# Altium PCB SumoPCB.PcbDoc (part 1 of 2)
Units mil, origin at the board's own origin, x right, y up, seen from the top; angles counter-clockwise.
Board outline 5511.81 x 5511.81 mil, 2 copper layers (Top Layer, Bottom Layer); 161 components, 158 nets, 711 pads, 189 vias.
Unrouted connection lines stored in the file: 147.
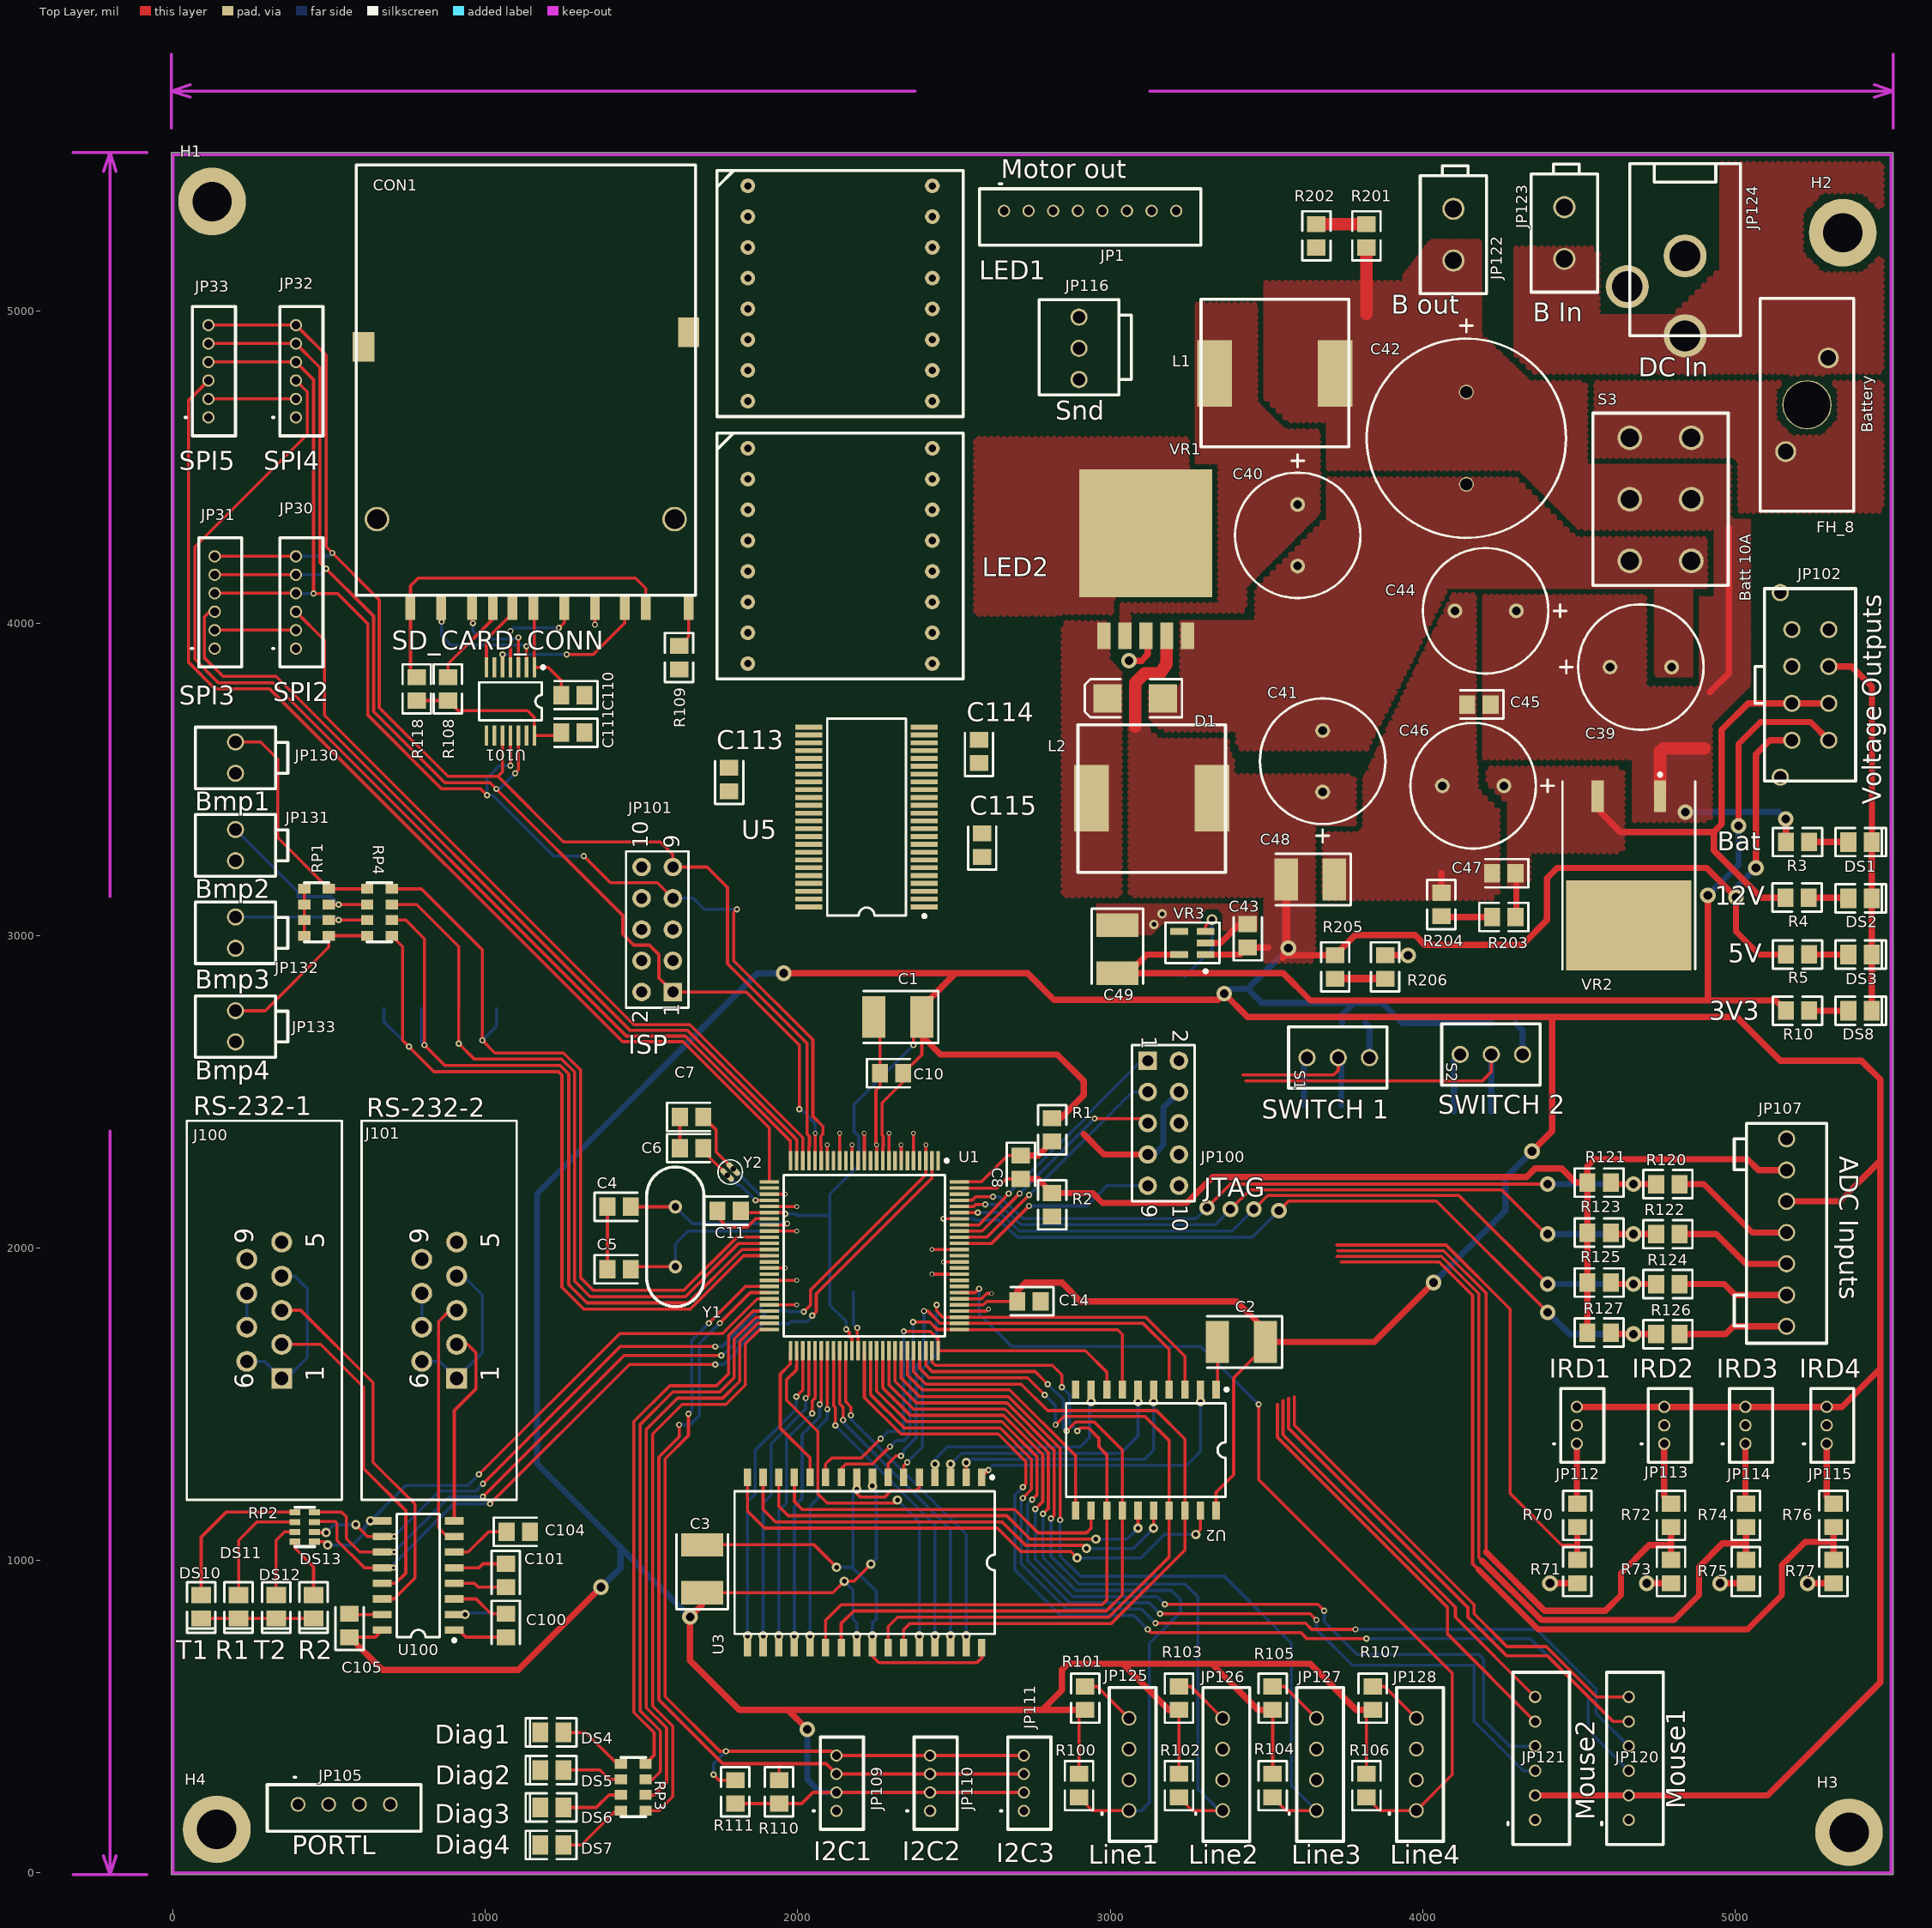
[diagram p0: Top Layer view]
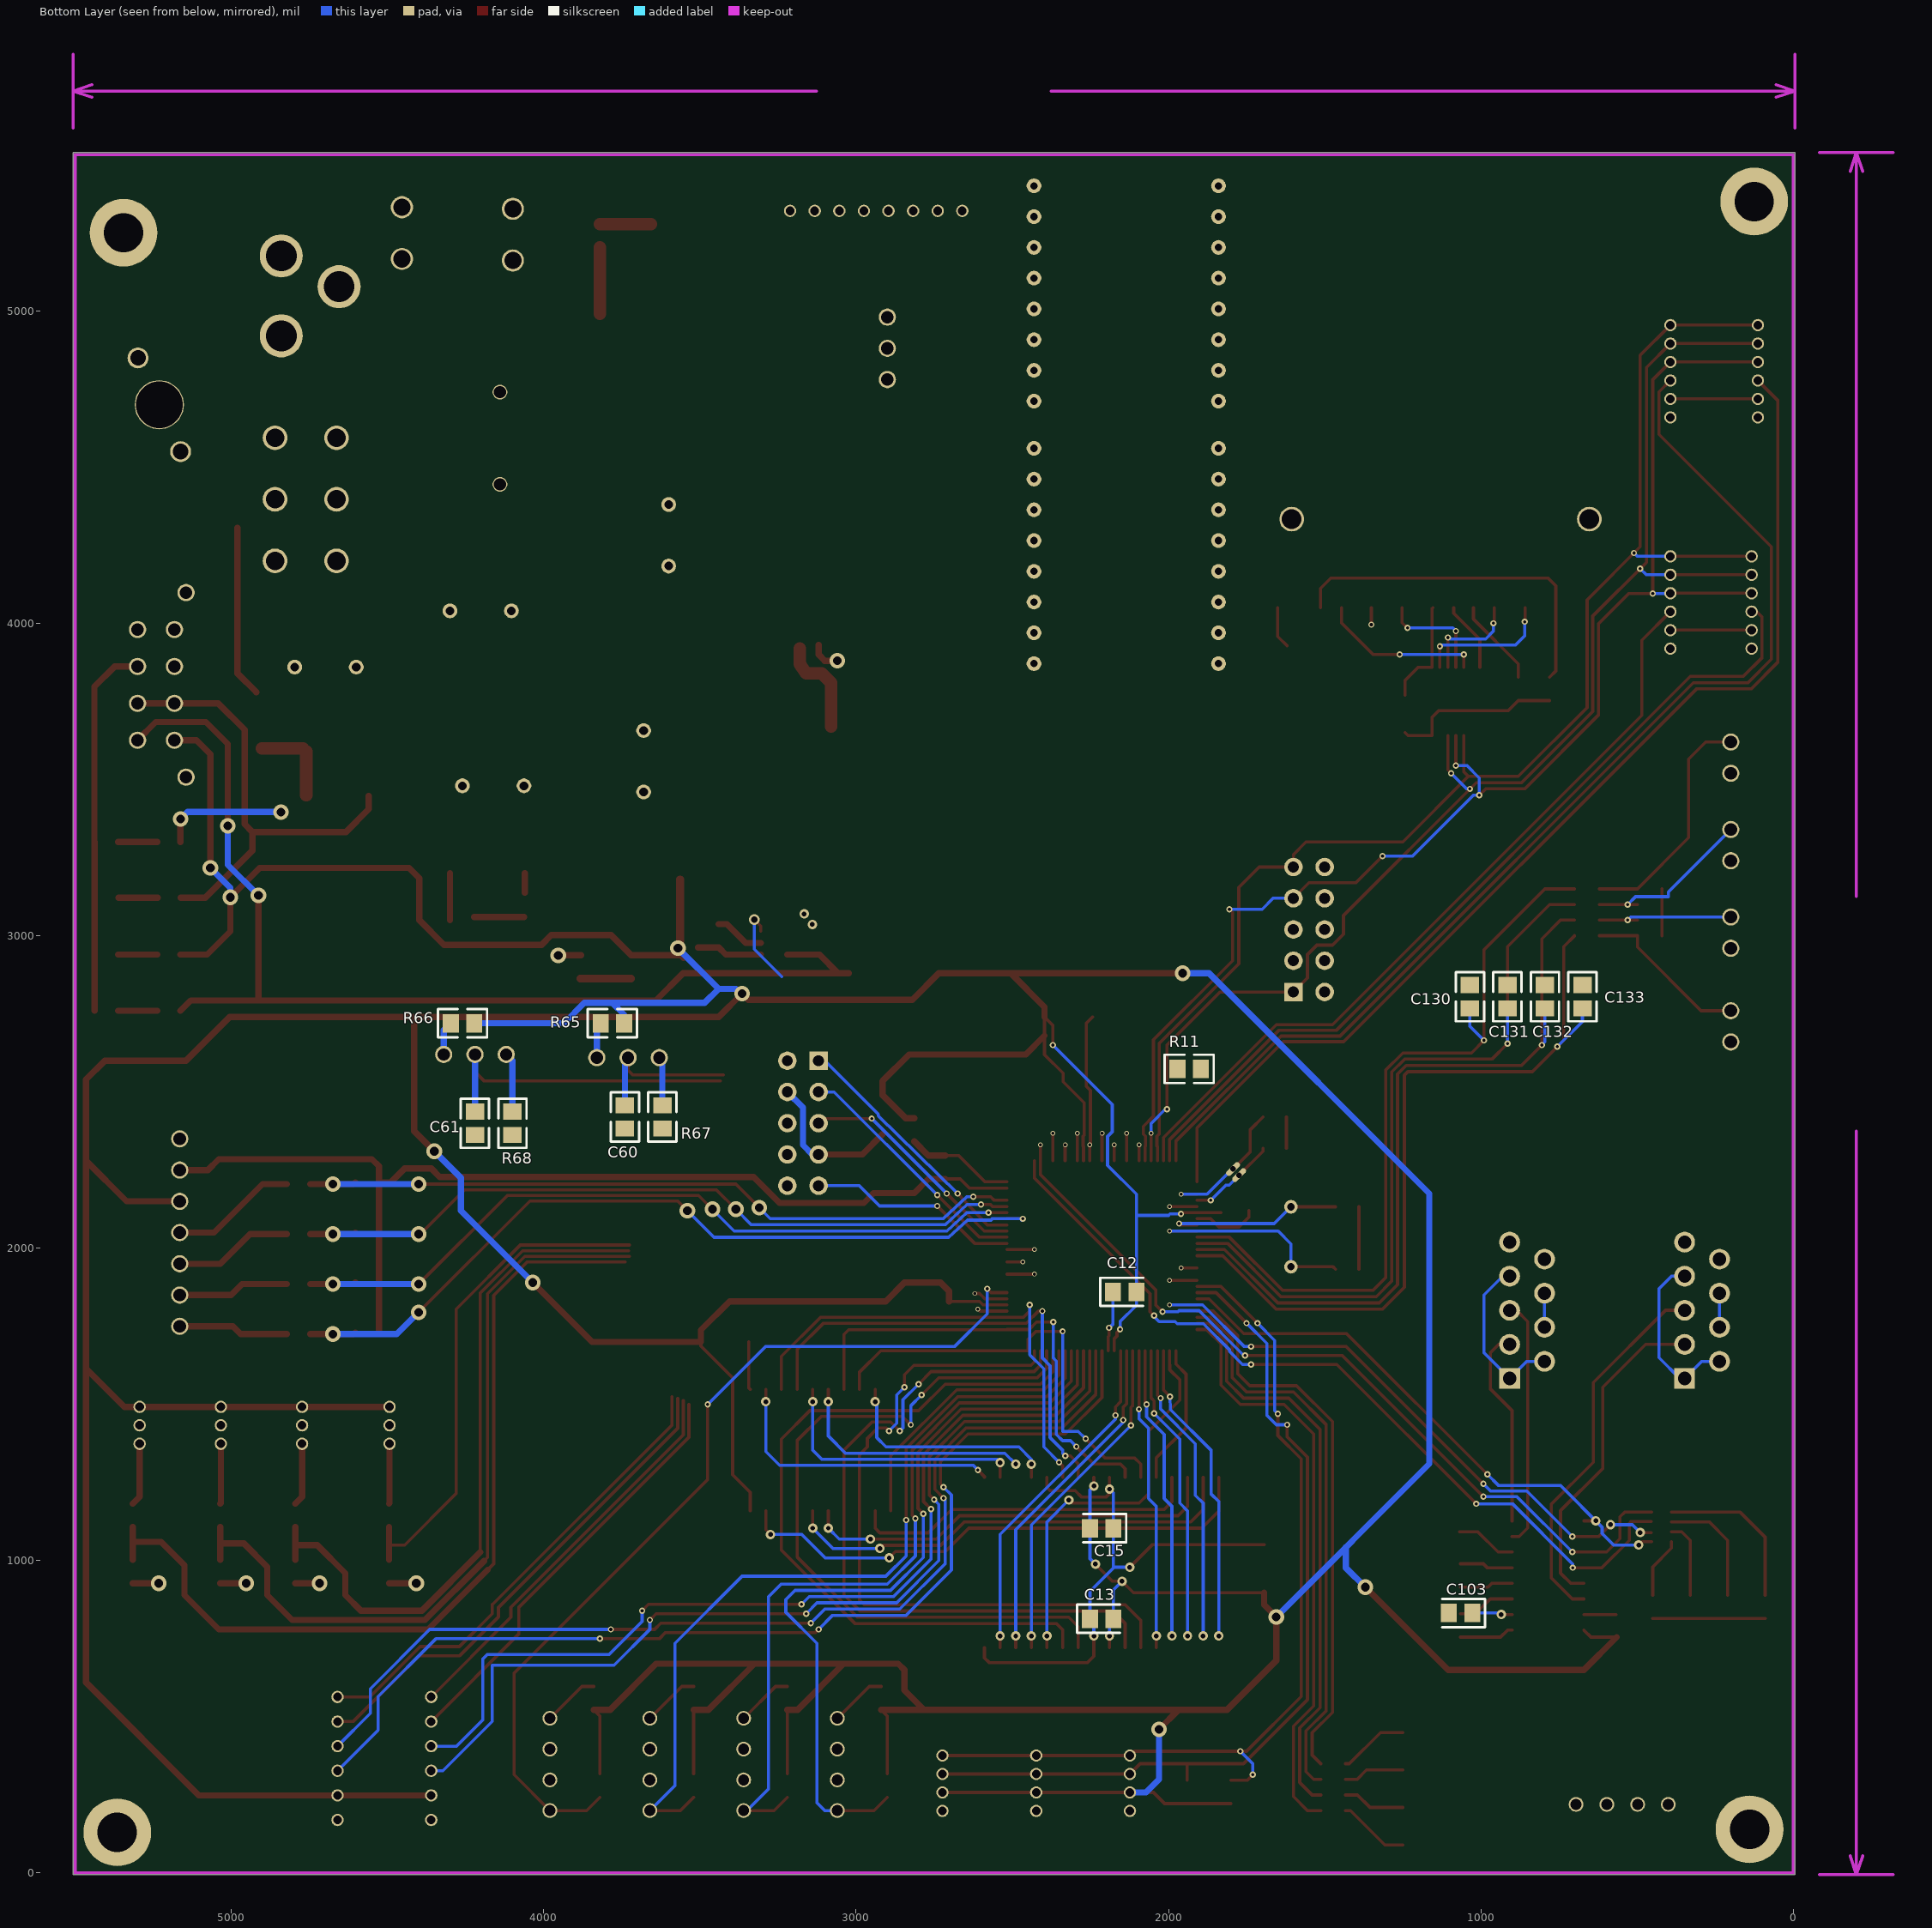
[diagram p1: Bottom Layer view, seen from below]

## Layer stack, top to bottom
Top Layer: signal copper 1.4
Dielectric: dielectric 12.6, FR-4, Dk 4.8
Bottom Layer: signal copper 1.4

## Board outline
-5.2,-5.2 5506.61,-5.2 5506.61,5506.61 -5.2,5506.61

## Design rules (kind name [scope] priority, off if disabled: settings)
Clearance Clearance_1_Polygons [(InPolygon)] p1: gap=15
Clearance Clearance_2_All [All] p2: gap=8
ComponentClearance [All] p1: gap=10 collisioncheckmode=0
PolygonConnect [All] p1: connectstyle=Direct reliefconductorwidth=10 reliefentries=4 polygonreliefangle="90 Angle"
RoomDefinition "Power Regulation and Protection" [InComponentClass('Power Regulation and Protection')] p1: confinementstyle=ConfineIn formatcopy=TRUE outline 3110,6430 6130,6430 6130,7400 3110,7400
RoomDefinition "Microcontroller and Memory" [InComponentClass('Microcontroller and Memory')] p2: confinementstyle=ConfineIn formatcopy=TRUE outline 13630,-470 14720,-470 14720,680 13630,680
RoomDefinition "Interfaces and Connectors - Sensors" [InComponentClass('Interfaces and Connectors - Sensors')] p3: confinementstyle=ConfineIn formatcopy=TRUE outline -1370,7070 230,7070 230,9640 -1370,9640
RoomDefinition "Interfaces and Connectors" [InComponentClass('Interfaces and Connectors')] p4: confinementstyle=ConfineIn formatcopy=TRUE outline 15890,-290 17600,-290 17600,1330 15890,1330
RoutingLayers [All] p1: top layer=Horizontal bottom layer=Vertical
RoutingVias "Schematic Routing Via Style" [All] p1: holewidth=28 width=50 viastyle="Through Hole" minholewidth=10 minwidth=20 maxholewidth=28 maxwidth=50
SMDToPlane [All] p1: distance=0
SolderMaskExpansion [All] p1: expansion=4
TestPointUsage [All] p1: valid=0 allowmultiple=FALSE
Testpoint [All] p1: side=15 testpointundercomponent=TRUE minsize=40 maxsize=100 preferedsize=60 minholesize=0 maxholesize=40 preferedholesize=32 testpointgrid=1 style=1023 order=-539222988
Width "Schematic Width Constraint" [All] p1: maxlimit=100 minlimit=10 preferedwidth=10 toplayer_prefwidth=20 bottomlayer_prefwidth=20 minimp=50.000000 maximp=50.000000 favimp=50.000000
16 further rules are at their usual default settings.

## Classes and differential pairs
net class AD[0..7]: AD0 AD1 AD2 AD3 AD4 AD5 AD6 AD7
net class A[8..15]: A0 A1 A2 A3 A4 A5 A6 A7 A8 A9 A10 A11 A12 A13 A14 A15
component class "Power Regulation and Protection": C39 C40 C41 C42 C43 C44 C45 C46 C47 C48 C49 D1 FH_8 L1 L2 R201 R202 R203 R204 R205 R206 S3 VR1 VR2 VR3
component class "Microcontroller and Memory": C1 C2 C3 C4 C5 C6 C7 C8 C10 C11 C12 C13 C14 C15 DS1 DS2 DS3 DS4 DS5 DS6 DS7 DS8 H1 H2 H3 H4 R1 R2 R3 R4 R5 R10 R11 RP3 U1 U2 U3 Y1 Y2
component class "Interfaces and Connectors": C100 C101 C103 C104 C105 C110 C111 C113 C114 C115 CON1 DS10 DS11 DS12 DS13 J100 J101 JP1 JP30 JP31 JP32 JP33 JP100 JP101 JP102 JP105 JP107 JP109 JP110 JP111 JP116 JP120 JP121 JP124 LED1 LED2 R108 R109 R110 R111 R118 R120 R121 R122 R123 R124 R125 R126 R127 RP2 U5 U100 U101
component class "Interfaces and Connectors - Sensors": C60 C61 C130 C131 C132 C133 JP112 JP113 JP114 JP115 JP120 JP121 JP125 JP126 JP127 JP128 JP130 JP131 JP132 JP133 R65 R66 R67 R68 R70 R71 R72 R73 R74 R75 R76 R77 R100 R101 R102 R103 R104 R105 R106 R107 RP1 RP4 S1 S2

## Components (designator, comment, footprint, x,y, rotation, side; value= is the part's Value field where it differs from the comment)
C1 "Cap Tant" CC4532-1812 2320,2740 r180 top
C2 "Cap Tant" CC4532-1812 3420,1700 r180 top
C3 "Cap Tant" CC4532-1812 1693.92,973.92 r90 top
C4 "20pF" CC2012-0805 1427.78,2132.5 r0 top
C5 "20pF" CC2012-0805 1427.78,1932.5 r0 top
C6 "6pF" CC2012-0805 1660,2320 r0 top
C7 "6pF" CC2012-0805 1660,2420 r0 top
C8 "100nF" CC2012-0805 2713.92,2258.92 r270 top
C10 "Cap Semi" CC2012-0805 2300,2560 r0 top
C11 "Cap Semi" CC2012-0805 1780,2120 r0 top
C12 "Cap Semi" CC2012-0805 2140,1860 r180 bottom
C13 "Cap Semi" CC2012-0805 2213.92,813.92 r180 bottom
C14 "Cap Semi" CC2012-0805 2740,1830 r180 top
C15 "Cap Semi" CC2012-0805 2213.92,1103.92 r0 bottom
C39 "Cap Pol1" CAPPOL5-10X13 4600,3860 r0 top
C40 "Cap Pol1" CAPPOL5-10X13 3600,4380 r270 top
C41 "Cap Pol1" CAPPOL5-10X13 3680,3460 r90 top
C42 "Cap Pol1" CAPPOL7.5-16 4140,4740 r270 top
C43 "Cap Pol3" CC2012-0805 3440,3000 r90 top
C44 "Cap Pol1" CAPPOL5-10X13 4300,4040 r180 top
C45 "Cap Pol3" CC2012-0805 4180,3740 r180 top
C46 "Cap Pol1" CAPPOL5-10X13 4260,3480 r180 top
C47 "Cap Pol3" CC2012-0805 4260,3200 r180 top
C48 "Tant" CC4532-1812 3640,3180 r180 top
C49 "Low ESR 0.3-10R Tant" CC4532-1812 3023,2957 r270 top
C60 "Cap Semi" CR2012-0805 3740,2420 r90 bottom
C61 "Cap Semi" CR2012-0805 4220,2400 r270 bottom
C100 "Cap Semi" CC2012-0805 1065,792.4 r270 top
C101 "Cap Semi" CC2012-0805 1065,952.4 r270 top
C103 "Cap Semi" CC2012-0805 1065,832.4 r0 bottom
C104 "Cap Semi" CC2012-0805 1105,1092.4 r0 top
C105 "Cap Semi" CC2012-0805 565,792.4 r90 top
C110 "Cap Semi" CC2012-0805 1280,3770 r180 top
C111 "Cap Semi" CC2012-0805 1280,3650 r180 top
C113 "Cap Semi" CC2012-0805 1780,3500 r90 top
C114 "Cap Semi" CC2012-0805 2580,3590 r90 top
C115 "Cap Semi" CC2012-0805 2590,3290 r90 top
C130 "Cap Semi" CR2012-0805 1035,2805 r270 bottom
C131 "Cap Semi" CR2012-0805 915,2805 r270 bottom
C132 "Cap Semi" CR2012-0805 795,2805 r270 bottom
C133 "Cap Semi" CR2012-0805 675,2805 r270 bottom
CON1 "SD_CARD_CONN" "SD CARD AVX" 760,4050 r0 top
D1 "10BQ100" SMB 3080,3760 r180 top
DS1 "Bat" "SMD _LED" 5400,3300 r180 top
DS2 "12V" "SMD _LED" 5400,3120 r180 top
DS3 "5V" "SMD _LED" 5400,2940 r180 top
DS4 "Diag1" "SMD _LED" 1212.6,450 r0 top
DS5 "Diag2" "SMD _LED" 1212.6,330 r0 top
DS6 "Diag3" "SMD _LED" 1212.6,210 r0 top
DS7 "Diag4" "SMD _LED" 1212.6,90 r0 top
DS8 "3V3" "SMD _LED" 5400,2760 r180 top
DS10 "T1" "SMD _LED" 90,852.4 r90 top
DS11 "R1" "SMD _LED" 210,852.4 r90 top
DS12 "T2" "SMD _LED" 330,852.4 r90 top
DS13 "R2" "SMD _LED" 450,852.4 r90 top
FH_8 "Battery" "FUSEHOLDER MINIBLADE" 5380,5040 r180 top
H1 "M3 Clearance" "M3 CLEARANCE" 125,5350 r0 top
H2 "M3 Clearance" "M3 CLEARANCE" 5345,5250 r0 top
H3 "M3 Clearance" "M3 CLEARANCE" 5365,130 r0 top
H4 "M3 Clearance" "M3 CLEARANCE" 140,140 r0 top
J100 "RS-232-1" "DSUB1.385-2H9 SIMPLE" 540,1195 r90 top
J101 "RS-232-2" "DSUB1.385-2H9 SIMPLE" 1100,1195 r90 top
JP1 "Motor out" "PHR 1X8 2MM" 2660,5320 r0 top
JP30 "SPI2" "ZHR 1X6 1.5MM" 480,3860 r90 top
JP31 "SPI3" "ZHR 1X6 1.5MM" 220,3860 r90 top
JP32 "SPI4" "ZHR 1X6 1.5MM" 480,4600 r90 top
JP33 "SPI5" "ZHR 1X6 1.5MM" 200,4600 r90 top
JP100 "JTAG" HDR2X5 3120,2600 r270 top
JP101 "ISP" HDR2X5 1600,2820 r90 top
JP102 "Voltage Outputs" "microfit 2x4 3mm" 5300,3980 r90 top
JP105 "PORTL" "EHR 1X4 2.5MM" 400,220 r0 top
JP107 "ADC Inputs" "KK 1X7 2.54MM" 5165,2350 r270 top
JP109 "I2C1" "ZHR 1X4 1.5MM" 2210,140 r90 top
JP110 "I2C2" "ZHR 1X4 1.5MM" 2510,140 r90 top
JP111 "I2C3" "ZHR 1X4 1.5MM" 2810,140 r90 top
JP112 "IRD1" "ZHR 1X3 1.5MM" 4580,1315 r90 top
JP113 "IRD2" "ZHR 1X3 1.5MM" 4860,1315 r90 top
JP114 "IRD3" "ZHR 1X3 1.5MM" 5120,1315 r90 top
JP115 "IRD4" "ZHR 1X3 1.5MM" 5380,1315 r90 top
JP116 "Snd" "KK 1X3 2.54MM" 2900,4780 r90 top
JP120 "Mouse1" "PHR 1X6 2MM" 4660,170 r90 top
JP121 "Mouse2" "PHR 1X6 2MM" 4360,170 r90 top
JP122 "B out" "MINI-FIT JNR 2X1 4.2MM" 4205,5055 r90 top
JP123 "B In" "MINI-FIT JNR 2X1 4.2MM" 4560,5060 r90 top
JP124 "DC In" "DC JACK 2.1MM" 4840,4920 r90 top
JP125 "Line1" "EHR 1X4 2.5MM" 3060,200 r90 top
JP126 "Line2" "EHR 1X4 2.5MM" 3360,200 r90 top
JP127 "Line3" "EHR 1X4 2.5MM" 3660,200 r90 top
JP128 "Line4" "EHR 1X4 2.5MM" 3980,200 r90 top
JP130 "Bmp1" "KK 1X2 2.54MM" 200,3520 r90 top
JP131 "Bmp2" "KK 1X2 2.54MM" 200,3240 r90 top
JP132 "Bmp3" "KK 1X2 2.54MM" 200,2960 r90 top
JP133 "Bmp4" "KK 1X2 2.54MM" 200,2660 r90 top
L1 "Inductor" "CDRH125 INDUCTOR" 3720,4800 r90 top
L2 "Inductor" "CDRH125 INDUCTOR" 2940,3440 r270 top
LED1 "8x8 LED Matrix" "8X8 LED MATRIX" 1840,5400 r0 top
LED2 "8x8 LED Matrix" "8X8 LED MATRIX" 1840,4560 r0 top
R1 "0K" R2012-0805 2813.92,2378.92 r90 top
R2 "0K" R2012-0805 2813.92,2138.92 r90 top
R3 "Res3" R2012-0805 5200,3300 r180 top
R4 "Res3" R2012-0805 5198.6,3122 r180 top
R5 "Res3" R2012-0805 5200,2940 r180 top
R10 "Res3" R2012-0805 5200,2760 r180 top
R11 "Res3" R2012-0805 1933.92,2573.92 r180 bottom
R65 "Res3" R2012-0805 3780,2720 r180 bottom
R66 "Res3" R2012-0805 4260,2720 r180 bottom
R67 "Res3" R2012-0805 3620,2420 r270 bottom
R68 "Res3" R2012-0805 4100,2400 r270 bottom
R70 "Res1" CR2012-0805 4495,1145 r90 top
R71 "Res1" CR2012-0805 4495,965 r90 top
R72 "Res1" CR2012-0805 4795,1145 r90 top
R73 "Res1" CR2012-0805 4795,965 r90 top
R74 "Res1" CR2012-0805 5035,1145 r90 top
R75 "Res1" CR2012-0805 5035,965 r90 top
R76 "Res1" CR2012-0805 5315,1145 r90 top
R77 "Res1" CR2012-0805 5315,965 r90 top
R100 "Res1" R2012-0805 2900,280 r270 top
R101 "Res1" R2012-0805 2920,560 r90 top
R102 "Res1" R2012-0805 3220,280 r270 top
R103 "Res1" R2012-0805 3220,560 r90 top
R104 "Res1" R2012-0805 3520,280 r270 top
R105 "Res1" R2012-0805 3520,560 r90 top
R106 "Res1" R2012-0805 3820,280 r270 top
R107 "Res1" R2012-0805 3840,560 r90 top
R108 "Res3" CR2012-0805 880,3790 r270 top
R109 "Res3" CR2012-0805 1620,3890 r270 top
R110 "10K" CR2012-0805 1940,260 r270 top
R111 "10K" CR2012-0805 1800,260 r270 top
R118 "Res3" CR2012-0805 780,3790 r270 top
R120 "Res1" CR2012-0805 4785,2205 r0 top
R121 "Res1" CR2012-0805 4565,2210 r0 top
R122 "Res1" CR2012-0805 4785,2045 r0 top
R123 "Res1" CR2012-0805 4565,2050 r0 top
R124 "Res1" CR2012-0805 4785,1885 r0 top
R125 "Res1" CR2012-0805 4565,1890 r0 top
R126 "Res1" CR2012-0805 4785,1725 r0 top
R127 "Res1" CR2012-0805 4565,1730 r0 top
R201 "Res3" R2012-0805 3820,5240 r90 top
R202 "Res3" R2012-0805 3660,5240 r270 top
R203 "Res3" R2012-0805 4260,3060 r180 top
R204 "Res3" R2012-0805 4060,3100 r90 top
R205 "Res3" R2012-0805 3720,2900 r270 top
R206 "Res3" R2012-0805 3880,2900 r90 top
RP1 "ResPack x4" "4X0805 RESISTOR PACK" 420,3000 r90 top
RP2 "ResPack x4" "4X0603 RESISTOR PACK" 390,1155 r270 top
RP3 "ResPack x4" "4X0805 RESISTOR PACK" 1512.6,350 r270 top
RP4 "ResPack x4" "4X0805 RESISTOR PACK" 700,3150 r270 top
S1 "SWITCH 1" "SW SPDT" 3630,2610 r0 top
S2 "SWITCH 2" "SW SPDT" 4120,2620 r0 top
S3 "Batt 10A" "SW  DPDT" 4860,4200 r90 top
U1 "ATmega2560" F-QFP14X14-G100/Z17N 2212.7,1976.05 r270 top
U2 "74HC373M" SO-G20/Y1.45 3113.92,1353.92 r180 top
U3 "K6R1008C1D" SO-G32/Y1.45 2213.92,993.92 r180 top
U5 "TLS5920" SSO-G48 2220,3380 r90 top
U100 "MAX232" SO-G16/C5.85 785,952.4 r90 top
U101 "MAX3392E" TSSOP14 1080,3750 r180 top
VR1 "LM2595S-5.0" "TO-263 5 PIN SMT" 2980,3960 r270 top
VR2 "MC7812CD2T" 936-03 4660,3240 r180 top
VR3 "TPS76333DBVR" SOT-23-5 3263,2977 r90 top
Y1 "16MHz" "CRYSTAL HC49SLF" 1607.78,2132.5 r270 top
Y2 "32kHz" "CRYSTAL CFS206" 1773.92,2233.92 r45 top

## Footprints (in the part's own frame and the unit in brackets; to place one, negate y for a bottom-side part, rotate by r counter-clockwise, add the part's x,y. Pads: shape width x height; smd on the part's side, far side on the other; paste and mask are expansions set on the pad)
"4X0603 RESISTOR PACK" [mm] "4x0603 Resistor pack 3.2 x 1.6mm, 0.8mm Pitch"
  rect 0.5x0.9 smd: 1(0,0) 2(0.8,0) 3(1.6,0) 4(2.4,0) 5(2.4,1.6) 6(1.6,1.6) 7(0.8,1.6) 8(0,1.6)
  silkscreen extent -0.4,0 2.8,1.6
"4X0805 RESISTOR PACK" [mm] "4x0805 Resistor pack 5.08 x 2mm, 1.27mm Pitch"
  rect 0.8x1 smd: 1(0,-2) 2(1.27,-2) 3(2.54,-2) 4(3.81,-2) 5(3.81,0) 6(2.54,0) 7(1.27,0) 8(0,0)
  silkscreen extent -0.5,-2 4.3,0
"8X8 LED MATRIX" [mm] "8x8 LED matrix 2.5mm pitch"
  round 1.2 hole 0.6: 1(0,0) 2(0,-2.5) 3(0,-5) 4(0,-7.5) 5(0,-10) 6(0,-12.5) 7(0,-15) 8(0,-17.5) 9(15,-17.5) 10(15,-15) 11(15,-12.5) 12(15,-10) 13(15,-7.5) 14(15,-5) 15(15,-2.5) 16(15,0)
  silkscreen extent -2.5,-18.75 17.5,1.25
936-03 [mm] "D2-PAK/TO-263-AB; 3 Leads (1 Cropped); Body 14.7 (inc. leads) x 10.2 mm (LxW max)"
  rect 1x2.6 smd: 1(-2.54,-5.25) 3(2.54,-5.25)
  rect 10.2x7.3 smd: 4(0,5.25)
  silkscreen extent -5.4,-7.12 5.4,8.8
CAPPOL5-10X13 [mm]
  round 1.2 hole 0.7: 1(0,0) 2(5,0)
  silkscreen extent -4.06,-5.1 7.6,5.1
CAPPOL7.5-16 [mm] "7.5P, 16D, 0.8PD"
  round 1.2 hole 1: 1(0,0) 2(7.5,0)
  silkscreen extent -5.9,-8.1 11.85,8.1
CC2012-0805 [mm]
  rect 1.3x1.5 smd: 1(-0.95,0) 2(0.95,0)
  silkscreen extent -2,-1.15 1.5,1.15
CC4532-1812 [mm]
  rect 1.9x3.4 smd: 1(-1.95,0) 2(1.95,0)
  silkscreen extent -3.3,-2.1 2.8,2.1
"CDRH125 INDUCTOR" [mm] "CDRH125 Inductor 12.3mm x 12.3mm"
  rect 5.4x2.8 smd: 1(0,0) 2(0,9.8)
  silkscreen extent -5.98,-1.1 6.02,10.9
CR2012-0805 [mm]
  rect 1.3x1.5 smd: 1(-0.95,0) 2(0.95,0)
  silkscreen extent -2,-1.15 2,1.15
"CRYSTAL CFS206" [mm] "Crystal CFS206 0.7mm pitch 0.2mm lead"
  oval 0.45x1.4 hole 0.45: 1(0,0) 2(0.7,0)
  silkscreen extent -0.65,-1 1.35,1
"CRYSTAL HC49SLF" [mm] "HC49SLF TH 4.88mm Pitch, 0.43mm lead"
  round 1.1 hole 0.6: 1(0,0) 2(4.88,0)
  silkscreen extent -3.23,-2.32 8.12,2.32
"DC JACK 2.1MM" [mm] "DC Jack 2.1mm  Altronics P0620"
  round 3.5 hole 2.5: 1(0,0) 2(6.5,0) 3(4,4.7)
  silkscreen extent 0,-4.5 14,4.5
"DSUB1.385-2H9 SIMPLE" [mm]
  rect 1.69x1.69 hole 1.09: 1(9.86,4.88)
  round 1.69 hole 1.09: 2(12.63,4.88) 3(15.4,4.88) 4(18.17,4.88) 5(20.94,4.88) 6(11.245,7.72) 7(14.015,7.72) 8(16.785,7.72) 9(19.555,7.72)
  silkscreen extent 0,0 30.8,12.6
"EHR 1X4 2.5MM" [mm] "JST EHR 1x4 2.5mm 3A"
  round 1.2 hole 0.9: 1(0,0) 2(2.5,0) 3(5,0) 4(7.5,0)
  silkscreen extent -2.5,-2.2 10,2.2
F-QFP14X14-G100/Z17N [mm]
  rect 1.55x0.3 smd: 1(-7.725,6) 2(-7.725,5.5) 3(-7.725,5) 4(-7.725,4.5) 5(-7.725,4) 6(-7.725,3.5) 7(-7.725,3) 8(-7.725,2.5) 9(-7.725,2) 10(-7.725,1.5) 11(-7.725,1) 12(-7.725,0.5) 13(-7.725,0) 14(-7.725,-0.5) 15(-7.725,-1) 16(-7.725,-1.5) 17(-7.725,-2) 18(-7.725,-2.5) 19(-7.725,-3) 20(-7.725,-3.5) 21(-7.725,-4) 22(-7.725,-4.5) 23(-7.725,-5) 24(-7.725,-5.5) 25(-7.725,-6) 51(7.725,-6) 52(7.725,-5.5) 53(7.725,-5) 54(7.725,-4.5) 55(7.725,-4) 56(7.725,-3.5) 57(7.725,-3) 58(7.725,-2.5) 59(7.725,-2) 60(7.725,-1.5) 61(7.725,-1) 62(7.725,-0.5) 63(7.725,0) 64(7.725,0.5) 65(7.725,1) 66(7.725,1.5) 67(7.725,2) 68(7.725,2.5) 69(7.725,3) 70(7.725,3.5) 71(7.725,4) 72(7.725,4.5) 73(7.725,5) 74(7.725,5.5) 75(7.725,6)
  rect 0.3x1.55 smd: 26(-6,-7.725) 27(-5.5,-7.725) 28(-5,-7.725) 29(-4.5,-7.725) 30(-4,-7.725) 31(-3.5,-7.725) 32(-3,-7.725) 33(-2.5,-7.725) 34(-2,-7.725) 35(-1.5,-7.725) 36(-1,-7.725) 37(-0.5,-7.725) 38(0,-7.725) 39(0.5,-7.725) 40(1,-7.725) 41(1.5,-7.725) 42(2,-7.725) 43(2.5,-7.725) 44(3,-7.725) 45(3.5,-7.725) 46(4,-7.725) 47(4.5,-7.725) 48(5,-7.725) 49(5.5,-7.725) 50(6,-7.725) 76(6,7.725) 77(5.5,7.725) 78(5,7.725) 79(4.5,7.725) 80(4,7.725) 81(3.5,7.725) 82(3,7.725) 83(2.5,7.725) 84(2,7.725) 85(1.5,7.725) 86(1,7.725) 87(0.5,7.725) 88(0,7.725) 89(-0.5,7.725) 90(-1,7.725) 91(-1.5,7.725) 92(-2,7.725) 93(-2.5,7.725) 94(-3,7.725) 95(-3.5,7.725) 96(-4,7.725) 97(-4.5,7.725) 98(-5,7.725) 99(-5.5,7.725) 100(-6,7.725)
  silkscreen extent -7.85,-6.55 6.55,6.83
"FUSEHOLDER MINIBLADE" [mm] "FuseHolder Miniblade"
  round 1.7 hole 1.27: 1(2.07,4.84) 2(5.53,12.46)
  round 4 hole 3.8: ""(3.8,8.65)
  silkscreen extent 0,0 7.6,17.3
HDR2X5 [mm] "Connector; Header; 5x2 Position"
  rect 1.5x1.5 hole 0.9: 1(0,0)
  round 1.5 hole 0.9: 2(0,2.54) 3(2.54,0) 4(2.54,2.54) 5(5.08,0) 6(5.08,2.54) 7(7.62,0) 8(7.62,2.54) 9(10.16,0) 10(10.16,2.54)
  silkscreen extent -1.27,-1.27 11.43,3.81
"KK 1X2 2.54MM" [mil] "KK 1x2 2.54mm 4A"
  round 55 hole 40: 1(0,0) 2(100,0)
  silkscreen extent -49,-167 148,128
"KK 1X3 2.54MM" [mil] "KK 1x3 2.54mm 4A"
  round 55 hole 40: 1(0,0) 2(100,0) 3(200,0)
  silkscreen extent -49,-167 256,128
"KK 1X7 2.54MM" [mil] "Molex KK 1x7 2.54mm 4A"
  round 55 hole 40: 1(0,0) 2(100,0) 3(200,0) 4(300,0) 5(400,0) 6(500,0) 7(600,0)
  silkscreen extent -49,-167 654,128
"M3 CLEARANCE" [mm] "M3 Clearance.   3.2mm ID for M3 screw"
  round 5.5 hole 3.2: 1(0,0)
"microfit 2x4 3mm" [mm] "microfit 2x4 3mm 5A"
  round 1.4 hole 1.02: 1(0,0) 2(-3,0) 3(-6,0) 4(-9,0) 5(0,3) 6(-3,3) 7(-6,3) 8(-9,3) nc(-12,3.94) nc(3,3.94)
  silkscreen extent -12.32,-2.18 3.32,6
"MINI-FIT JNR 2X1 4.2MM" [mm] "Mini-Fit Jnr 2x1 4.2mm pitch 9A"
  round 1.8 hole 1.4: 1(2.7,2.7) 2(6.9,2.7)
  silkscreen extent 0,0 10.4,5.4
"PHR 1X6 2MM" [mm] "JST PHR 1x6 2mm 2A"
  round 1 hole 0.7: 1(0,0) 2(2,0) 3(4,0) 4(6,0) 5(8,0) 6(10,0)
  silkscreen extent -2,-2.8 12,2.2
"PHR 1X8 2MM" [mm] "JST PHR 1x8 2mm 2A"
  round 1 hole 0.7: 1(0,0) 2(2,0) 3(4,0) 4(6,0) 5(8,0) 6(10,0) 7(12,0) 8(14,0)
  silkscreen extent -2,-2.8 16,2.2
R2012-0805 [mm]
  rect 1.3x1.5 smd: 1(-0.95,0) 2(0.95,0)
  silkscreen extent -2,-1.15 2,1.15
"SD CARD AVX" [mm] "SD Card AVX 145638009211862"
  rect 0.8x2 smd: 1(2.5,0) 2(5,0) 3(8.3,0) 4(10,0) 5(12.5,0) 6(15,0) 7(17.43,0) 8(19.13,0) 9(0,0) 10(6.7,0) 11(22.62,0)
  rect 1.7x2.4 smd: 12(22.63,22.4)
  rect 1.8x2.4 smd: ""(-3.82,21.2)
  round 2 hole 1.6: ""(-2.72,7.2) ""(21.48,7.2)
  silkscreen extent -4.42,1 23.18,36
SMB [mm] "DO-214-AA/SMB; 2 C-Bend Leads; Body 5.3 x 3.6 mm, inc. leads (LxW)"
  rect 2.3x2.3 smd: 1(-2.25,0) 2(2.25,0)
  silkscreen extent -3.8,-1.55 4.1,1.55
"SMD _LED" [mm]
  rect 1.3x1.6 smd: 1(0.95,0) 2(-0.95,0)
  silkscreen extent -2.13,-1.15 2,1.15
SO-G16/C5.85 [mm]
  rect 0.6x1.55 smd: 1(-4.445,-2.925) 2(-3.175,-2.925) 3(-1.905,-2.925) 4(-0.635,-2.925) 5(0.635,-2.925) 6(1.905,-2.925) 7(3.175,-2.925) 8(4.445,-2.925) 9(4.445,2.925) 10(3.175,2.925) 11(1.905,2.925) 12(0.635,2.925) 13(-0.635,2.925) 14(-1.905,2.925) 15(-3.175,2.925) 16(-4.445,2.925)
  silkscreen extent -5.39,-3.05 5,1.75
SO-G20/Y1.45 [mm]
  rect 0.6x1.45 smd: 1(-5.715,-4.925) 2(-4.445,-4.925) 3(-3.175,-4.925) 4(-1.905,-4.925) 5(-0.635,-4.925) 6(0.635,-4.925) 7(1.905,-4.925) 8(3.175,-4.925) 9(4.445,-4.925) 10(5.715,-4.925) 11(5.715,4.925) 12(4.445,4.925) 13(3.175,4.925) 14(1.905,4.925) 15(0.635,4.925) 16(-0.635,4.925) 17(-1.905,4.925) 18(-3.175,4.925) 19(-4.445,4.925) 20(-5.715,4.925)
  silkscreen extent -6.69,-5.05 6.48,3.8
SO-G32/Y1.45 [mm]
  rect 0.6x1.45 smd: 1(-9.525,-6.925) 2(-8.255,-6.925) 3(-6.985,-6.925) 4(-5.715,-6.925) 5(-4.445,-6.925) 6(-3.175,-6.925) 7(-1.905,-6.925) 8(-0.635,-6.925) 9(0.635,-6.925) 10(1.905,-6.925) 11(3.175,-6.925) 12(4.445,-6.925) 13(5.715,-6.925) 14(6.985,-6.925) 15(8.255,-6.925) 16(9.525,-6.925) 17(9.525,6.925) 18(8.255,6.925) 19(6.985,6.925) 20(5.715,6.925) 21(4.445,6.925) 22(3.175,6.925) 23(1.905,6.925) 24(0.635,6.925) 25(-0.635,6.925) 26(-1.905,6.925) 27(-3.175,6.925) 28(-4.445,6.925) 29(-5.715,6.925) 30(-6.985,6.925) 31(-8.255,6.925) 32(-9.525,6.925)
  silkscreen extent -10.58,-7.05 10.58,5.8
SOT-23-5 [mm]
  rect 0.55x1.45 smd: 1(-0.95,-1.075) 2(0,-1.075) 3(0.95,-1.075) 4(0.95,1.075) 5(-0.95,1.075)
  silkscreen extent -2.42,-2.2 1.65,2.2
SSO-G48 [mm] "SSO-G48 25mil (~0.6mm)P 48 pads"
  rect 0.4x2.2 smd: 1(-7.302,-4.7) 2(-6.667,-4.7) 3(-6.032,-4.7) 4(-5.397,-4.7) 5(-4.763,-4.7) 6(-4.127,-4.7) 7(-3.492,-4.7) 8(-2.857,-4.7) 9(-2.222,-4.7) 10(-1.587,-4.7) 11(-0.952,-4.7) 12(-0.317,-4.7) 13(0.318,-4.7) 14(0.953,-4.7) 15(1.588,-4.7) 16(2.223,-4.7) 17(2.858,-4.7) 18(3.492,-4.7) 19(4.127,-4.7) 20(4.763,-4.7) 21(5.397,-4.7) 22(6.032,-4.7) 23(6.667,-4.7) 24(7.302,-4.7) 25(7.302,4.7) 26(6.667,4.7) 27(6.032,4.7) 28(5.397,4.7) 29(4.763,4.7) 30(4.127,4.7) 31(3.492,4.7) 32(2.857,4.7) 33(2.222,4.7) 34(1.587,4.7) 35(0.952,4.7) 36(0.317,4.7) 37(-0.318,4.7) 38(-0.953,4.7) 39(-1.588,4.7) 40(-2.223,4.7) 41(-2.858,4.7) 42(-3.492,4.7) 43(-4.127,4.7) 44(-4.763,4.7) 45(-5.397,4.7) 46(-6.032,4.7) 47(-6.667,4.7) 48(-7.302,4.7)
  silkscreen extent -8.18,-4.83 8,3.2
"SW  DPDT" [mm] "Alltronics Toggle"
  round 2 hole 1.5: 1(0,0) 2(5,0) 3(10,0) 4(0,5) 5(5,5) 6(10,5)
  silkscreen extent -2,-3 12,8
"SW SPDT" [mm] "SW SPDT 0.1\" pitch"
  round 1.4 hole 1: 1(0,0) 2(2.54,0) 3(5.08,0)
  silkscreen extent -1.5,-2.5 6.5,2.5
"TO-263 5 PIN SMT" [mm] "TO-263 5 Pin SMT"
  rect 2.16x1.07 smd: 1(0,0) 2(0,1.7) 3(0,3.4) 4(0,5.1) 5(0,6.8)
  rect 10.41x10.8 smd: 3(-8.33,3.4)
TSSOP14 [mm] "Shrink Small Outline; 14 Leads; Body Width 4.4 mm; Pitch 0.65 mm"
  rect 0.3x1.65 smd: 1(-1.95,-2.775) 2(-1.3,-2.775) 3(-0.65,-2.775) 4(0,-2.775) 5(0.65,-2.775) 6(1.3,-2.775) 7(1.95,-2.775) 8(1.95,2.775) 9(1.3,2.775) 10(0.65,2.775) 11(0,2.775) 12(-0.65,2.775) 13(-1.3,2.775) 14(-1.95,2.775)
  silkscreen extent -2.77,-2.9 2.55,1.55
"ZHR 1X3 1.5MM" [mm] "JST ZHR 1x3 1.5mm 1A"
  round 1 hole 0.7: 1(1.5,2.2) 2(3,2.2) 3(4.5,2.2)
  silkscreen extent 0,0 6,4.1
"ZHR 1X4 1.5MM" [mm] "JST ZHR 1x4 1.5mm 1A"
  round 1 hole 0.7: 1(1.5,2.2) 2(3,2.2) 3(4.5,2.2) 4(6,2.2)
  silkscreen extent 0,0 7.5,4.1
"ZHR 1X6 1.5MM" [mm] "JST ZHR 1x6 1.5mm 1A"
  round 1 hole 0.7: 1(1.5,2.2) 2(3,2.2) 3(4.5,2.2) 4(6,2.2) 5(7.5,2.2) 6(9,2.2)
  silkscreen extent 0,0 10.5,4.1

## Part data
C1 C2 C3 C100 C101 C103 C104 C105: library part "Cap Pol2", "Polarized Capacitor (Axial)"
C4 C5 C6 C7 C8: library part Cap, "Capacitor"
C10 C11 C12 C13 C14 C15 C60 C61 C110 C111 C113 C114 C115 C130 C131 C132 C133: "Capacitor (Semiconductor SIM Model)"
C39 C40 C41 C42 C44 C46: "Polarized Capacitor (Radial)"
C43 C45 C47: "Polarized Capacitor (Surface Mount)"
C48 C49: library part "Cap Semi", "Capacitor (Semiconductor SIM Model)"
D1: "Schottky Rectifier"
DS1 DS2 DS3 DS4 DS5 DS6 DS7 DS8 DS10 DS11 DS12 DS13: library part LED3, "Typical BLUE SiC LED"
FH_8: library part Fuse_Holder, "Fuse Holder"
H1 H2 H3 H4: library part "M3 Clearance hole", "3.2mm ID clearance hole for M3 screw"
J100 J101: library part "D Connector 9", "Receptacle Assembly, 9 Position, Right Angle"
JP1: library part "Header 8", "Header, 8-Pin"
JP30 JP31 JP32 JP33: library part "Header 6", "Header, 6-Pin"
JP100 JP101: library part "Header 5X2", "Header, 5-Pin, Dual row"
JP102: library part "Header 4X2", "Header, 4-Pin, Dual row"
JP105 JP107 JP109 JP110 JP111: library part "Header 4", "Header, 4-Pin"
JP112 JP113 JP114 JP115: library part MHDR1X3, "Header, 3-Pin"
JP116 JP124: library part "Header 3", "Header, 3-Pin"
JP120 JP121 JP122 JP123 JP130 JP131 JP132 JP133: library part "Header 2", "Header, 2-Pin"
JP125 JP126 JP127 JP128: library part "Header 4H", "Header, 4-Pin, Right Angle"
R1 R2 R110 R111: library part Res1, "Resistor"
R3 R4 R5 R10 R11 R65 R66 R67 R68 R70 R71 R72 R73 R74 R75 R76 R77 R100 R101 R102 R103 R104 R105 R106 R107 R108 R109 R118 R120 R121 R122 R123 R124 R125 R126 R127 R201 R202 R203 R204 R205 R206: "Resistor"
S1 S2: library part SW-PB, "Switch"
S3: library part SW-SPDT, "SPDT Subminiature Toggle Switch, Right Angle Mounting, Vertical Actuation"
U1: "Atmel ATmega2560 MCU"
U2: library part 74373, "Octal 8-bit D-type Latch"
U3: "Samsung 128Kx8 High-Speed Static RAM"
U5: library part "TLC5920 16x8 LED Driver", "TLC5920 16x8 LED Driver"
U100: "Maxim RS-232 Transceiver"
VR1: "Simple Switcher Power Converter 150 kHz 1A Step Down Voltage Regulator"
VR2: "Three-Terminal Positive Voltage Regulator"
Y1 Y2: library part XTAL, "Crystal Oscillator"

## Via types
v1: diameter 20, hole 10, Top Layer to Bottom Layer, 98 vias
v2: diameter 30, hole 15, Top Layer to Bottom Layer, 37 vias
v3: diameter 50, hole 28, Top Layer to Bottom Layer, 32 vias
v4: diameter 15, hole 10, Top Layer to Bottom Layer, 21 vias
v5: diameter 35, hole 20, Top Layer to Bottom Layer, 1 vias

## Nets (pads, with @x,y where several pads share a name; then routed paths per layer and width w, separated by ;. In a path a pad name is that pad's centre, name@x,y a point inside that pad or via, vN(x,y) a via of type N, cw(c..) or ccw(c..) an arc to the next point about the centre after c; other vN are vias at no path point)
3V3: C49.2 C110.2 CON1.4 JP102.4 R10.2 U101.1 VR3.5 | length 3923.2
  Top Layer w10: CON1.4@1153.7,4050 1156.77,4046.93 U101.1@1156.77,3859.25 1200.75,3859.25 1242.6,3817.4 C110.2@1242.6,3770
  Top Layer w20: C49.2@3023,2880.23 3553.77,2880.23 3641,2793 5129.6,2793 R10.2@5162.6,2760 ; C49.2@3057.8,2880.23 3117.17,2939.6 VR3.5@3220.68,2939.6 ; 4913,2793 v3(4913,3129) ; v3(5011,3352) 5011,3614 5081,3684 5241.67,3684 JP102.4@5300,3625.67
  Bottom Layer w20: v3(4913,3129) 5011,3227 v3(5011,3352)
"3V3 ENABLE": U1.79 VR3.3 | length 361.3
  Top Layer w10: U1.79@2516.83,1798.88 2603.88,1798.88 v4(2610,1805) ; VR3.3@3305.32,3014.4 3305.32,3031.32 v5(3326,3052)
  Bottom Layer w10: 3238,2869 3326,2957 v5(3326,3052)
5V: C1.1 C2.1 C3.1 C10.2 C11.2 C12.2 C13.2 C14.2 C15.2 C41.1 C43.1 C48.2 C105.1 C111.2 C113.1 C114.1 C115.2 JP1.1 JP30.2 JP31.2 JP32.2 JP33.2 JP100.4 JP100.7 JP101.2 JP102.8 JP107.3 JP109.2 JP110.2 JP111.2 JP112.3 JP113.3 JP114.3 JP115.3 JP120.2 JP121.2 L2.2 R1.2 R5.2 R11.1 R65.2 R66.2 R100.1 R101.1 R102.1 R103.1 R104.1 R105.1 R106.1 R107.1 R108.2 R109.2 R110.2 R111.2 R118.2 R205.1 RP1.5 RP1.6 RP1.7 RP1.8 U1.10 U1.31 U1.61 U1.80 U2.20 U3.8 U3.24 U5.8 U5.18 U5.19 U5.31 U5.34 U100.16 U101.14 VR1.4 VR3.1 | length 31228.8
  Top Layer w10: JP33.2@113.39,4718.11 JP32.2@393.39,4718.11 ; JP31.2@133.39,3978.11 JP30.2@393.39,3978.11 ; RP1.8@420,3000 RP1.5@420,3150 ; C105.1@565,755 647.44,755 U100.16@669.84,777.4 ; R118.2@780,3752.6 R108.2@880,3752.6 912.6,3720 1135,3720 1156.77,3698.23 U101.14@1156.77,3640.75 1233.35,3640.75 C111.2@1242.6,3650 ; C3.1@1693.92,897.15 2112.15,897.15 v2(2148.92,933.92) 2178.92,933.92 v2(2233.92,988.92) ; R111.2@1800,222.6 2012.6,222.6 2048.11,258.11 JP111.2@2723.39,258.11 ; C11.2@1831.4,2113.84 1956.16,2113.84 v1(1960,2110) ; v1(2155,1740) 2165,1730 2165,1719.26 2173.33,1710.93 U1.61@2173.33,1671.91 ; U3.24@2188.92,721.28 v2(2188.92,758.92) ; v2(2238.92,1238.92) U3.8@2238.92,1266.56 ; U1.10@2271.76,2280.18 2271.76,2324.97 2273.44,2326.66 2273.44,2358 2270,2361.44 2270,2465 2337.4,2532.4 C10.2@2337.4,2560 2396.77,2619.37 C1.1@2396.77,2740 2370,2713.23 v1(2370,2650) ; U1.80@2516.83,1818.57 2593.57,1818.57 2605,1830 C14.2@2702.6,1830 ; R100.1@2900,317.4 2900,502.6 R101.1@2920,522.6 ; R102.1@3220,317.4 R103.1@3220,522.6 ; U2.20@3338.92,1160.02 3338.92,1218.92 3395,1275 3395,1585 3496.77,1686.77 C2.1@3496.77,1700 ; R104.1@3520,317.4 R105.1@3520,522.6 ; R106.1@3820,317.4 3820,502.6 R107.1@3840,522.6
  Top Layer w20: C105.1@565,755 670,650 1105,650 v3(1370,915) ; C3.1@1693.92,897.15 1693.92,858.92 v3(1655,820) 1655,680 1812.4,522.6 R101.1@2920,522.6 ; v3(1955,2880) 2735,2880 2820,2795 3345,2795 v3(3365,2815) 3440,2740 5005,2740 5145,2600 5405,2600 5465,2540 5465,610 5103.74,248.74 JP121.2@4360,248.74 ; 1967.4,522.6 v3(2030,460) ; C1.1@2396.77,2680 2456.77,2620 2830,2620 2915,2535 2915,2490 2841.32,2416.32 R1.2@2813.92,2416.32 ; C1.1@2396.77,2740 2396.77,2771.77 2505,2880 ; C14.2@2702.6,1830 2702.6,1862.6 2730,1890 2845,1890 2905,1830 3405,1830 3496.77,1738.23 C2.1@3496.77,1700 3845,1700 v3(4035,1890) ; 2782.6,522.6 2845,585 2845,650 2865,670 3640,670 3787.4,522.6 R107.1@3840,522.6 ; 2915,2365 2980,2300 JP100.7@3120,2300 ; 3040,670 3187.4,522.6 R103.1@3220,522.6 ; VR3.1@3305.32,2939.6 3417,2939.6 C43.1@3440,2962.6 3505.4,2962.6 ; 3325,670 3472.4,522.6 R105.1@3520,522.6 ; v3@3554.8,2942.6 3560,2937.4 R205.1@3720,2937.4 3784.6,3002 3976,3002 4007,2971 4319,2971 4398,3050 4398,3184 4431,3217 4909,3217 v3(5003,3123) 5003,3014 5077,2940 R5.2@5162.6,2940 ; v3(4350,2310) 4415,2375 4415,2740 ; JP112.3@4493.39,1492.17 5342.17,1492.17 5465,1615 ; v3(5067,3217) 5067,3581 5111.67,3625.67 JP102.8@5181.89,3625.67 ; JP107.3@5165,2150 5335,2150 5465,2280
  Top Layer w20.47: 3552.6,2930 3556.3,2933.7 3560,2937.4 v3@3563.23,2940.63
  Top Layer w25: v3@3563.23,2940.63 C48.2@3563.23,3180
  Top Layer w40: 3080,3670 3080,3810 3110,3840 3160,3840 3180,3870 VR1.4@3180,3920
  Bottom Layer w10: v1(1960,2110) 1995,2110 2000,2105 2102.6,2105 ; v2(2148.92,933.92) 2176.52,906.32 C13.2@2176.52,813.92 2188.92,801.52 v2(2188.92,758.92) ; v1(2155,1740) 2155,1765 2102.6,1817.4 2102.6,2172.6 2195,2265 2195,2357.47 2180,2372.47 2180,2460 v1(2370,2650) ; v2(2233.92,988.92) 2251.32,1006.32 2251.32,1226.52 v2(2238.92,1238.92)
  Bottom Layer w20: v3(1370,915) 1431.97,976.97 1431.97,1043.03 ; v3(1655,820) 1165,1310 1165,2175 1870,2880 v3(1955,2880) ; v3(2030,460) 2030,300 2071.89,258.11 JP109.2@2123.39,258.11 ; JP100.7@3120,2300 3140,2300 3170,2330 3170,2450 JP100.4@3220,2500 ; v3(3365,2815) 3370,2815 3385,2830 3440,2830 ; v3(3570,2960) 3440,2830 ; R65.2@3742.6,2720 3742.6,2747.6 3780,2785 ; v3(4035,1890) 4265,2120 4265,2225 v3(4350,2310) ; R66.2@4222.6,2720 3935,2720 3870,2785 3485,2785 3440,2830 ; v3(5003,3123) 5003,3153 v3(5067,3217)
5VSENSE: R205.2 R206.1 U1.87 | length 213.1
  Top Layer w10: v4(2466.32,1956.36) U1.87@2516.83,1956.36
  Top Layer w25: R205.2@3720,2862.6 R206.1@3882.6,2862.6
12V: C46.1 C47.1 JP1.2 JP102.3 JP102.7 JP116.2 R4.2 R203.1 VR2.3 | length 1690.8
  Top Layer w20: R203.1@4300,3050 C47.1@4300,3200 ; VR2.3@4560,3446.69 4560,3405 4633,3332 4932,3332 ; R4.2@5161.2,3122 5083,3122 4932,3273 4932,3332 ; JP102.3@5300,3743.78 5041.78,3743.78 4957,3659 4957,3357 4932,3332
  Top Layer w20.47: VR2.3@4560,3416 VR2.3@4560,3446.69
12VSENSE: R203.2 R204.1 U1.88 | length 160
  Top Layer w20: R204.1@4062.6,3060 R203.2@4222.6,3060
A0: U2.2 U3.1 | length 934.4
  Top Layer w10: U3.1@2588.92,1266.56 2588.92,1268.92 v1(2610,1290) ; v2(3288.92,1508.92) U2.2@3288.92,1547.82
  Bottom Layer w10: v1(2610,1290) 2625,1305 3245,1305 3288.92,1348.92 v2(3288.92,1508.92)
A1: U2.5 U3.2 | length 857.8
  Top Layer w10: U3.2@2538.92,1266.56 v2(2538.92,1313.92) ; v2(3138.92,1508.92) U2.5@3138.92,1547.82
  Bottom Layer w10: v2(2538.92,1313.92) 2548.92,1323.92 3108.92,1323.92 3138.92,1353.92 v2(3138.92,1508.92)
A2: U2.6 U3.3 | length 791.2
  Top Layer w10: v2@2488.92,1303.92 v2(2488.92,1308.92) ; v2(3088.92,1508.92) U2.6@3088.92,1547.82
  Bottom Layer w10: v2(2488.92,1308.92) 2523.92,1343.92 3033.92,1343.92 3088.92,1398.92 v2(3088.92,1508.92)
A3: U2.9 U3.4 | length 737.3
  Top Layer w10: U3.4@2438.92,1266.56 v2(2438.92,1308.92) ; v2(2938.92,1508.92) U2.9@2938.92,1547.82
  Bottom Layer w10: v2(2438.92,1308.92) 2438.92,1323.92 2478.92,1363.92 2903.92,1363.92 2933.92,1393.92 2933.92,1503.92 v2(2938.92,1508.92)
A4: U2.12 U3.13 | length 1131.4
  Top Layer w10: U3.13@1988.92,1266.56 1988.92,1188.92 2013.92,1163.92 2693.92,1163.92 2768.92,1088.92 2923.92,1088.92 2938.92,1103.92 U2.12@2938.92,1160.02
A5: U2.15 U3.14 | length 1356.7
  Top Layer w10: U3.14@1938.92,1266.56 1938.92,1173.92 1968.92,1143.92 2668.92,1143.92 2743.92,1068.92 v2(2953.92,1068.92) ; v2(3088.92,1103.92) U2.15@3088.92,1160.02
  Bottom Layer w10: v2(2953.92,1068.92) 3053.92,1068.92 v2(3088.92,1103.92)
A6: U2.16 U3.15 | length 1487.4
  Top Layer w10: U3.15@1888.92,1266.56 1888.92,1163.92 1928.92,1123.92 2653.92,1123.92 2728.92,1048.92 2913.92,1048.92 v2(2923.92,1038.92) ; v2(3138.92,1103.92) U2.16@3138.92,1160.02
  Bottom Layer w10: v2(2923.92,1038.92) 3073.92,1038.92 v2(3138.92,1103.92)
A7: U2.19 U3.16 | length 1718.2
  Top Layer w10: U3.16@1838.92,1266.56 1838.92,1158.92 1893.92,1103.92 2638.92,1103.92 2713.92,1028.92 2873.92,1028.92 v2(2893.92,1008.92) ; v2(3273.92,1083.92) 3288.92,1098.92 U2.19@3288.92,1160.02
  Bottom Layer w10: v2(2893.92,1008.92) 3098.92,1008.92 3173.92,1083.92 v2(3273.92,1083.92)
A8: U1.53 U3.17 | length 985.8
  Top Layer w10: v1(1995,1525) 2015.85,1545.85 U1.53@2015.85,1671.91
  Bottom Layer w10: v2(1838.92,758.92) 1838.92,1188.92 1863.92,1213.92 1863.92,1353.92 1993.92,1483.92 v1(1995,1525)
A9: U1.54 U3.18 | length 973.7
  Top Layer w10: v1(2025,1520) 2035.53,1530.53 U1.54@2035.53,1671.91
  Bottom Layer w10: v2(1888.92,758.92) 1888.92,1183.92 1913.92,1208.92 1913.92,1373.92 2025,1485 v1(2025,1520)
A10: U1.55 U3.19 | length 961.2
  Top Layer w10: v1(2046.28,1471.28) 2046.28,1511.28 2055.22,1520.22 U1.55@2055.22,1671.91
  Bottom Layer w10: v2(1938.92,758.92) 1938.92,1158.92 1963.92,1183.92 1963.92,1388.92 v1(2046.28,1471.28)
A11: U1.56 U3.20 | length 948.6
  Top Layer w10: v1(2070,1500) 2074.9,1504.9 U1.56@2074.9,1671.91
  Bottom Layer w10: v2(1988.92,758.92) 1988.92,1173.92 2013.92,1198.92 2013.92,1403.92 2070,1460 v1(2070,1500)
A12: U1.57 U3.21 | length 973.7
  Top Layer w10: U3.21@2038.92,721.28 v2(2038.92,758.92) ; v1(2094.59,1484.59) U1.57@2094.59,1671.91
  Bottom Layer w10: v2(2038.92,758.92) 2038.92,1173.92 2063.92,1198.92 2063.92,1423.92 2094.59,1454.59 v1(2094.59,1484.59)
A13: U1.58 U3.29 | length 1085.1
  Top Layer w10: U1.58@2114.27,1671.91 2114.27,1496.49 2120,1490.76 v1(2120,1432.84) ; U3.29@2438.92,721.28 v2(2438.92,758.92)
  Bottom Layer w10: v1(2120,1432.84) 2438.92,1113.92 v2(2438.92,758.92)
A14: U1.59 U3.30 | length 1097.7
  Top Layer w10: U1.59@2133.96,1671.91 2133.96,1502.26 2145,1491.22 v1(2145,1450) ; U3.30@2488.92,721.28 v2(2488.92,758.92)
  Bottom Layer w10: v1(2145,1450) 2145,1442.84 2488.92,1098.92 v2(2488.92,758.92)
A15: U1.60 U3.31 | length 1110.2
  Top Layer w10: U1.60@2153.64,1671.91 2153.64,1508.03 2170,1491.67 v1(2170,1465) ; U3.31@2538.92,721.28 v2(2538.92,758.92)
  Bottom Layer w10: v1(2170,1465) 2170,1452.84 2538.92,1083.92 v2(2538.92,758.92)
AD0: U1.78 U2.3 U3.6 | length 1573.4
  Top Layer w10: U3.6@2338.92,1266.56 2338.92,1303.92 v1(2350,1315) ; v1(2443.92,1818.92) 2443.92,1799.4 2463.81,1779.51 2463.81,1779.2 U1.78@2516.83,1779.2 ; U1.78@2520.36,1779.2 3113.64,1779.2 3238.92,1653.92 U2.3@3238.92,1547.82
  Bottom Layer w10: v1(2350,1315) 2398.92,1363.92 2398.92,1613.92 2443.92,1658.92 v1(2443.92,1818.92)
AD1: U1.77 U2.4 U3.7 | length 1552.7
  Top Layer w10: U3.7@2288.92,1266.56 2288.92,1310 2313.92,1335 v1(2330,1335) ; v1(2403.92,1798.92) 2415.8,1798.92 2454.9,1759.83 ; 2454.9,1759.51 U1.77@2516.83,1759.51 ; U1.77@2517.15,1759.2 3105.36,1759.2 3188.92,1675.64 U2.4@3188.92,1547.82
  Bottom Layer w10: v1(2330,1335) 2338.92,1343.92 2338.92,1353.92 2378.92,1393.92 2378.92,1623.92 2403.92,1648.92 v1(2403.92,1798.92)
AD2: U1.76 U2.7 U3.10 | length 1518.8
  Top Layer w10: U3.10@2138.92,1266.56 2138.92,1293.92 2153.92,1308.92 2238.92,1308.92 v1(2295,1365) ; v1(2368.92,1763.92) 2422.2,1763.92 2446.3,1739.83 U1.76@2516.83,1739.83 ; U1.76@2517.46,1739.2 3023.64,1739.2 3038.92,1723.92 U2.7@3038.92,1547.82
  Bottom Layer w10: v1(2295,1365) 2313.92,1383.92 2338.92,1383.92 2358.92,1403.92 2358.92,1638.92 2368.92,1648.92 v1(2368.92,1763.92)
AD3: U1.75 U2.8 U3.11 | length 1437.5
  Top Layer w10: U3.11@2088.92,1266.56 2088.92,1308.92 2108.92,1328.92 2203.92,1328.92 v1(2265,1390) ; v1(2338.92,1733.92) 2423.92,1733.92 2448.92,1708.92 U1.75@2448.92,1671.91 2920.93,1671.91 2988.92,1603.92 U2.8@2988.92,1547.82
  Bottom Layer w10: v1(2265,1390) 2288.92,1413.92 2338.92,1413.92 v1(2338.92,1733.92)
AD4: U1.74 U2.13 U3.22 | length 2298.7
  Top Layer w10: U3.22@2088.92,721.28 2088.92,808.92 2138.92,858.92 2973.92,858.92 2988.92,873.92 2988.92,1338.92 2963.92,1363.92 2963.92,1391.08 2930,1425 2905,1425 v1(2895,1415) ; U1.74@2429.24,1671.91 2429.24,1635.76 2440,1625 2815,1625 2845,1595 v1(2845,1555)
  Bottom Layer w10: v1(2845,1555) 2870,1530 2870,1440 v1(2895,1415)